# EAGLE board schematic (EAGLE 8.6.0)
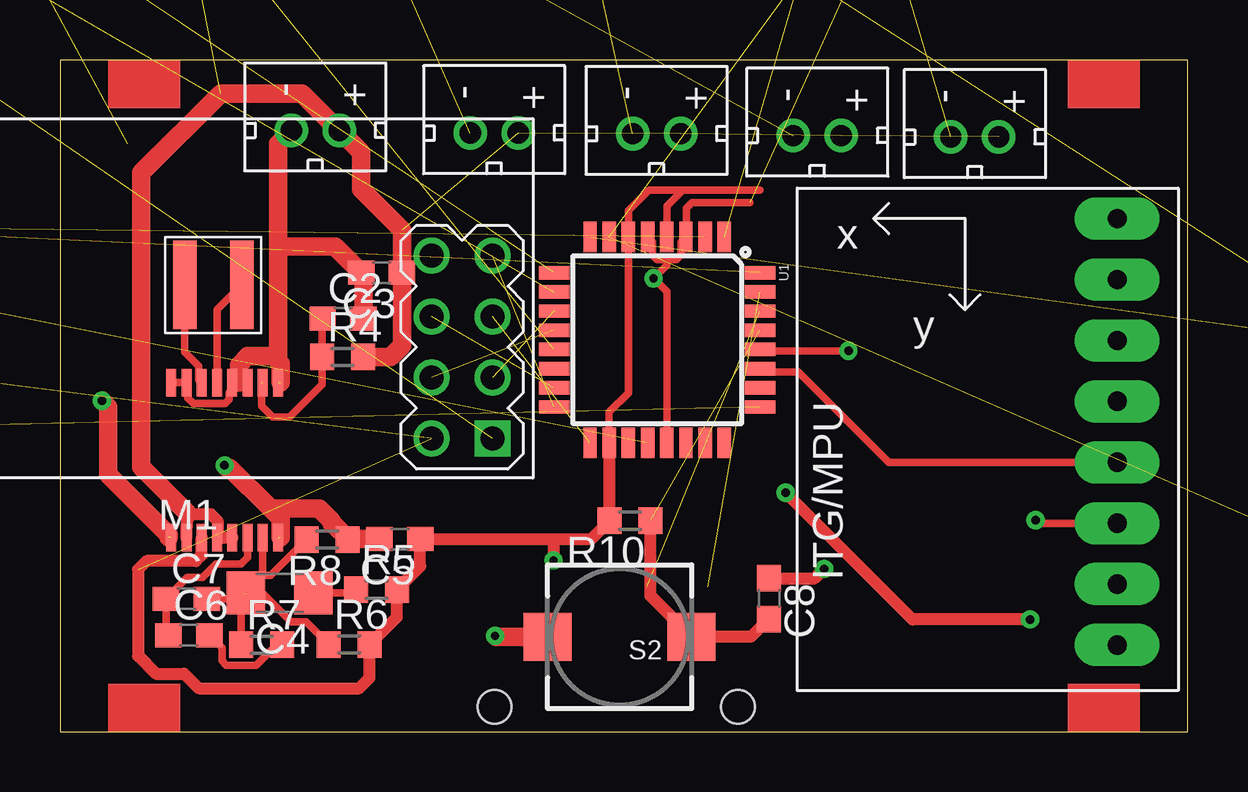
[diagram p0: board, top side]
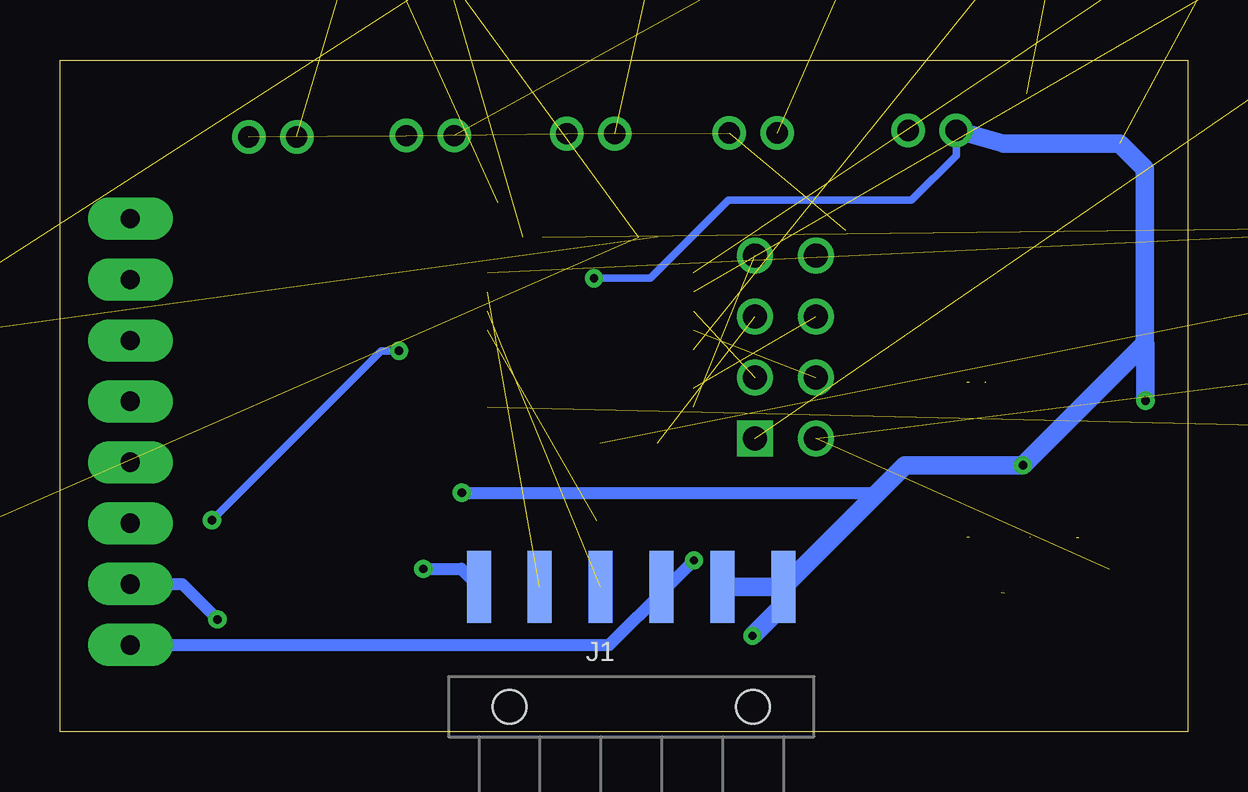
[diagram p1: board, bottom side, seen from below]

Size 47 x 28 mm. Coordinates in mm from the lower left corner, seen from the top.
Outline: 0,0 47,0 47,28 0,28 0,0
Copper layers (1*16): Top 0.035mm / dielectric 1.5mm / Bottom 0.035mm
Design rules "default": minimum track width 6mil, minimum drill 0.35mm, track to track 6mil, track to pad 6mil, pad to pad 6mil, via to via 6mil, smd to smd 6mil, copper to edge 40mil, drill to drill 6mil, minimum pad ring 10mil, minimum via ring 8mil, stop-mask expansion 4mil, vias tented up to drill 0mil, thermal gap 10mil

## Footprints (pad centres in the part's own frame; a part is rotated, then mirrored left to right if it is on the bottom)
C1210 = smd 1.6 x 2.7: 1 -1.4,0; 2 1.4,0
C0603 = smd 1.1 x 1: 1 -0.85,0; 2 0.85,0
C1206 = smd 1.6 x 1.8: 1 -1.4,0; 2 1.4,0
MINI2-F3-B = smd 1.22 x 0.85: NEG 0,1.55; POS 0,-1.5
FTDI_DEVICE_RA_SMT = smd 1 x 3: 1 -6.35,5; 2 -3.81,5; 3 -1.27,5; 4 1.27,5; 5 3.81,5; 6 6.35,5 | hole 1.4: -5.08,0; 5.08,0
XAL4020 = smd 0.98 x 3.7: 1 -1.185,0; 2 1.185,0
SML0603 = smd 0.8 x 0.8: A 0.75,0; C -0.75,0
WIRELESS-NRF24L01 = drill 1 square: 1 -12.7,6.35 | drill 1: 2 -10.16,6.35; 3 -12.7,3.81; 4 -10.16,3.81; 5 -12.7,1.27; 6 -10.16,1.27; 7 -12.7,-1.27; 8 -10.16,-1.27
CSM-7X-DU = smd 5.5 x 2: 1 -4.75,0; 2 4.75,0
R0603 = smd 1 x 1.1: 1 -0.85,0; 2 0.85,0
PUSHBUTTON_SMD_SJ = smd 2 x 2: P$1 3,0; P$2 -3,0
SOT23-3 = smd 0.8 x 0.9: 1 -0.95,-1; 2 0.95,-1; 3 0,1.1
TQFP32-08 = smd 1.27 x 0.559: 1 -4.293,2.8; 2 -4.293,2; 3 -4.293,1.2; 4 -4.293,0.4; 5 -4.293,-0.4; 6 -4.293,-1.2; 7 -4.293,-2; 8 -4.293,-2.8; 17 4.293,-2.8; 18 4.293,-2; 19 4.293,-1.2; 20 4.293,-0.4; 21 4.293,0.4; 22 4.293,1.2; 23 4.293,2; 24 4.293,2.8 | smd 0.559 x 1.27: 9 -2.8,-4.293; 10 -2,-4.293; 11 -1.2,-4.293; 12 -0.4,-4.293; 13 0.4,-4.293; 14 1.2,-4.293; 15 2,-4.293; 16 2.8,-4.293; 25 2.8,4.293; 26 2,4.293; 27 1.2,4.293; 28 0.4,4.293; 29 -0.4,4.293; 30 -1.2,4.293; 31 -2,4.293; 32 -2.8,4.293
GY-521 = drill 0.8 pad 1.778 long: ADO -8.89,-6.35; GND -8.89,6.35; INT -8.89,-8.89; SCL -8.89,3.81; SDA -8.89,1.27; VCC -8.89,8.89; XCL -8.89,-3.81; XDA -8.89,-1.27
SSOP-16GN = smd 0.419 x 1.143: 1 -2.223,-3.226; 2 -1.587,-3.226; 3 -0.953,-3.226; 4 -0.318,-3.226; 5 0.318,-3.226; 6 0.953,-3.226; 7 1.587,-3.226; 8 2.223,-3.226; 9 2.223,3.226; 10 1.587,3.226; 11 0.953,3.226; 12 0.318,3.226; 13 -0.318,3.226; 14 -0.953,3.226; 15 -1.587,3.226; 16 -2.223,3.226
JST_CONNECTOR_FEMALE = drill 0.889: + 0,1; - 0,-1

## Placement (x,y rotation side)
C1  100uF  [C1210]  -182.26,97.2 0 top  (outside the outline)
C2  0.056uF  [C0603]  11.8,17.22 0 top
C3  10uF  [C0603]  13.41,19.13 180 top
C4  65pF  [C1206]  9.16,5.78 180 top
C5  22uF  [C0603]  14.17,8.03 180 top
C6  470pF  [C0603]  5.37,4.02 0 top
C7  10pF  [C0603]  5.27,5.54 0 top
C8  0.1uF  [C0603]  29.55,5.54 270 top
C9  0.1uF  [C0603]  -182.07,63.31 0 top  (outside the outline)
C10  0.1uF  [C0603]  -182.07,58.43 0 top  (outside the outline)
C11  0.1uF  [C0603]  -182.07,53.56 0 top  (outside the outline)
C12  27pF  [C0603]  33.05,33.38 0 top  (outside the outline)
C13  27pF  [C0603]  -31.75,72.39 0 top  (outside the outline)
C14  10uF  [C0603]  -254.72,-18 0 top  (outside the outline)
C15  0.1uF  [C0603]  -254.72,-22.87 0 top  (outside the outline)
D1  DB2W40300L  [MINI2-F3-B]  -67.31,62.23 0 top  (outside the outline)
D2  DB2W40300L  [MINI2-F3-B]  -69.85,62.23 0 top  (outside the outline)
D3  DB2W40300L  [MINI2-F3-B]  10.44,86.79 0 top  (outside the outline)
D4  DB2W40300L  [MINI2-F3-B]  -2.16,70.38 0 top  (outside the outline)
J1  FTDI_DEVICERA_SMT  [FTDI_DEVICE_RA_SMT]  23.19,1.04 0 bottom
L1  3.3uH  [XAL4020]  6.39,18.62 180 top
LED1  RED  [SML0603]  -255.32,-47.86 0 top  (outside the outline)
LED2  RED  [SML0603]  -255.32,-51.7 0 top  (outside the outline)
LED3  YELLOW  [SML0603]  -255.32,-55.55 0 top  (outside the outline)
LED4  YELLOW  [SML0603]  -255.32,-59.39 0 top  (outside the outline)
M1  WIRELESS-NRF24L01  [WIRELESS-NRF24L01]  5.33,18.57 180 top
Q1  8MHz  [CSM-7X-DU]  54.88,11.36 90 top  (outside the outline)
R1  820  [R0603]  -133.35,35.33 0 top  (outside the outline)
R2  10K  [R0603]  -255.9,11.78 0 top  (outside the outline)
R3  10K  [R0603]  -255.9,6.91 0 top  (outside the outline)
R4  200K  [R0603]  11.78,15.62 0 top
R5  10K  [R0603]  13.2,5.92 0 top
R6  374K  [R0603]  12.05,3.63 0 top
R7  15K  [R0603]  8.41,3.62 0 top
R8  162K  [R0603]  11.14,8 180 top
R9  820  [R0603]  -133.35,31.03 0 top  (outside the outline)
R10  10K  [R0603]  23.76,8.79 180 top
R11  820  [R0603]  -133.35,22.44 0 top  (outside the outline)
R12  820  [R0603]  -133.35,26.74 0 top  (outside the outline)
R13  10K  [R0603]  -175.35,117.32 0 top  (outside the outline)
R14  10K  [R0603]  -175.35,112.44 0 top  (outside the outline)
R15  10K  [R0603]  -255.9,-27.75 0 top  (outside the outline)
R16  10K  [R0603]  -255.9,-32.63 0 top  (outside the outline)
S2  PUSH_BUTTON  [PUSHBUTTON_SMD_SJ]  23.33,3.95 180 top
T1  NMOS  [SOT23-3]  33.15,37.08 0 top  (outside the outline)
T2  NMOS  [SOT23-3]  -50.8,68.58 0 top  (outside the outline)
T3  NMOS  [SOT23-3]  -63.5,68.58 0 top  (outside the outline)
T4  NMOS  [SOT23-3]  -24.13,73.66 0 top  (outside the outline)
U1  ATMEGA328P_TQFP  [TQFP32-08]  24.89,16.33 270 top
U2  GY-521MPU6050  [GY-521]  35.18,12.5 180 top
U3  LTC3534  [SSOP-16GN]  6.86,11.32 180 top
U$1  JST_CONNECTOR_FEMALE  [JST_CONNECTOR_FEMALE]  10.64,25.07 270 top
U$4  JST_CONNECTOR_FEMALE  [JST_CONNECTOR_FEMALE]  38.13,24.79 270 top
U$7  JST_CONNECTOR_FEMALE  [JST_CONNECTOR_FEMALE]  31.57,24.85 270 top
U$10  JST_CONNECTOR_FEMALE  [JST_CONNECTOR_FEMALE]  24.87,24.93 270 top
U$13  JST_CONNECTOR_FEMALE  [JST_CONNECTOR_FEMALE]  18.1,24.96 270 top

## Library data of the parts
C1 C4 C8-C11 = rcl; SPICEPREFIX: C
C2 C3 C5-C7 C12-C15 R2-R8 R10 R13-R16 = resistor
D1-D4 M1 U2 U$1 U$4 U$7 U$10 U$13 = quad
J1 = quad; PROD_ID: CONN-08971
L1 = coilcraft
LED1-LED4 = led
Q1 = crystal; OC_FARNELL: unknown; OC_NEWARK: unknown
R1 R9 R11 R12 = rcl; SPICEPREFIX: R
S2 = adafruit
T1-T4 = quad; DATASHEET: http://www.mouser.com/ds/2/196/irlml6244pbf-936666.pdf; MOUSER: 942-IRLML6244TRPBF; URL: http://www.mouser.com/Search/ProductDetail.aspx?R=IRLML6244TRPBFvirtualkey57370000virtualkey942-IRLML6244TRPBF
U1 = quad; PROD_ID: IC-09069
U3 = LTC3534

## Nets
CE: M1.3 U1.11
CSN: M1.4 U1.12
DEBUG_LED1: R12.2 U1.32
DEBUG_LED2: R11.2 U1.2
DTR: C8.1 J1.1
GND: C1.2 C2.2 C3.2 C5.2 C9.2 C10.2 C11.2 C12.2 C13.2 C14.2 C15.2 J1.5 J1.6 LED1.C LED2.C LED3.C LED4.C M1.1 R3.1 R8.1 R13.1 R14.1 R15.1 R16.1 S2.P$1 T1.2 T2.2 T3.2 T4.2 U1.3 U1.5 U1.21 U2.GND U3.1 U3.3 U3.4 U3.7 U3.8 U3.9 U3.16 U$1.-
MISO: M1.7 U1.16
MOSI: M1.6 U1.15
N$1: C12.1 Q1.1 U1.7
N$2: C8.2 R10.1 S2.P$2 U1.29
N$3: D1.POS T1.3 U$4.-
N$4: C13.1 Q1.2 U1.8
N$5: D2.POS T2.3 U$7.-
N$6: D3.POS T3.3 U$10.-
N$7: D4.POS T4.3 U$13.-
N$8: L1.1 U3.5
N$9: L1.2 U3.6
N$10: LED1.A R1.2
N$11: LED2.A R9.1
N$12: LED3.A R12.1
N$13: LED4.A R11.1
N$14: C4.1 R5.1
N$16: C2.1 R4.1 U3.2
N$18: C4.2 C7.2 R6.1 R7.1 R8.2 U3.15
N$19: C6.1 C7.1 U3.14
N$20: C6.2 R7.2
N$25: C11.1 U1.20
PWM1: R13.2 T1.1 U1.1
PWM2: R14.2 T2.1 U1.9
PWM3: R15.2 T3.1 U1.10
PWM4: R16.2 T4.1 U1.13
PWR: C1.1 C3.1 D1.NEG D2.NEG D3.NEG D4.NEG R1.1 R2.2 R4.2 U3.10 U3.12 U3.13 U$1.+ U$4.+ U$7.+ U$10.+ U$13.+
RXD: J1.3 U1.30
SCK: M1.5 U1.17
SCL: U1.28 U2.SCL
SDA: U1.27 U2.SDA
TXD: J1.2 U1.31
V_BAT: R2.1 R3.2 U1.25
V_REG_OUT: C5.1 C9.1 C10.1 C14.1 C15.1 J1.4 M1.2 R5.2 R6.2 R9.2 R10.2 U1.4 U1.6 U1.18 U2.VCC U3.11

## Tracks (layer width: path | path; a pad name or v marks a point on that pad's centre or on a via)
CE  (1 unrouted)
CSN  (1 unrouted)
DEBUG_LED1  (1 unrouted)
DEBUG_LED2  (1 unrouted)
DTR  (via drill 0.35)
  Top 0.508: C8.1 31.46,6.39 v31.85,6.78
  Bottom 0.508: v31.85,6.78 30.28,6.78 J1.1
GND  (via drill 0.35)  (25 unrouted)
  Top 0.305: U3.4 7.47,14.54 | 7.47,14.54 U3.3 | 7.47,14.54 7.06,14.13 7.06,13.85 6.88,13.67 5.57,13.67 5.33,13.91 5.33,14.49 U3.7 U3.8 | 25.3,19.68 24.89,19.68 24.71,19.86 24.71,20.41 U1.5 | 25.3,19.68 25.7,19.68 25.88,19.86 25.88,20.41 U1.3 26.11,20.64 26.11,21.82 26.34,22.05 28.75,22.05 | 25.3,19.68 25.3,19.46 v24.74,18.9 25.29,18.34 U1.21
  Top 0.508: v40.44,4.67 35.53,4.67 v30.25,9.96
  Top 0.762: C2.2 12.65,19.03 C3.2 11.46,20.22 9.09,20.22 | 7.47,14.54 7.47,15.29 7.83,15.65 8.89,15.65 9.09,15.45 | 9.09,15.45 9.09,20.22 | 9.09,15.45 9.09,15.44 9.19,15.34 9.19,14.54 | 4.53,8.09 4.53,8.2 2.01,10.72 2.01,13.54 v1.75,13.79 | v6.86,11.1 6.96,11 7.08,11 8.79,9.29 | 9.09,20.22 9.09,24.51 U$1.- | C5.2 12.01,8.03 | 12.01,8.03 R8.1 | 8.79,9.29 9.19,8.88 9.19,8.09 | 11.32,8.67 11.32,8.72 | 8.79,9.29 10.8,9.29 11.32,8.77 11.32,8.72 | 11.32,8.72 12.01,8.03 | S2.P$1 18.17,3.95 v18.14,3.99
  Bottom 0.305: v24.74,18.9 22.38,18.9 19.13,22.15 11.51,22.15 9.64,24.01 U$1.-
  Bottom 0.508: U2.GND 41.91,6.15 v40.44,4.67 | v30.25,9.96 12.93,9.96 11.78,11.1
  Bottom 0.762: 1.78,16.18 v6.86,11.1 11.78,11.1 J1.6 | 1.78,16.18 1.78,23.47 2.82,24.51 7.66,24.51 U$1.- | v1.75,13.79 1.75,16.15 1.78,16.18 | v18.14,3.99 16.84,5.28 J1.6 | J1.5 J1.6
MISO  (1 unrouted)
MOSI  (1 unrouted)
N$1  (2 unrouted)
N$2  (1 unrouted)
  Top 0.508: C8.2 28.81,3.95 S2.P$2 24.61,5.67 R10.1
N$3  (2 unrouted)
N$4  (2 unrouted)
N$5  (2 unrouted)
N$6  (2 unrouted)
N$7  (2 unrouted)
N$8
  Top 0.305: U3.5 6.54,17.59 L1.1
N$9
  Top 0.305: U3.6 5.79,14.66 5.79,15.24 5.2,15.83 L1.2
N$10  (1 unrouted)
N$11  (1 unrouted)
N$12  (1 unrouted)
N$13  (1 unrouted)
N$14
  Top 0.305: C4.1 12.21,5.78 R5.1
N$16  (1 unrouted)
  Top 0.305: C2.1 10.93,17.2 R4.1 10.93,14.46 9.58,13.11 8.87,13.11 8.4,13.57 8.4,14.54
N$18  (1 unrouted)
  Top 0.305: 7.22,5.72 C4.2 | C4.2 8.45,6.47 8.45,6.5 | 7.38,3.81 R7.1 7.56,5.4 7.42,5.54 | C7.2 7.42,5.54 | 7.42,5.54 7.64,5.76 | U3.15 8.45,6.5 | R6.1 10.26,4.57 9.63,4.57 8.43,5.78 C4.2 | R8.2 8.79,6.5 8.45,6.5
N$19
  Top 0.305: C6.1 4.42,4.12 C7.1 5.31,6.43 5.94,6.43 6.5,6.98 7.54,6.98 7.82,7.25 U3.14
N$20
  Top 0.305: R7.2 9.04,3.62 8.19,2.76 6.93,2.76 6.75,2.94 6.75,3.48 C6.2
N$25  (1 unrouted)
PWM1  (2 unrouted)
PWM2  (2 unrouted)
PWM3  (2 unrouted)
PWM4  (2 unrouted)
PWR  (12 unrouted)
  Top 0.508: U3.13 6.57,8.09 6.57,8.79 6.29,9.07 5.34,9.07 5.28,9.01 5.28,8.57 | 5.28,8.57 5.29,8.55 | U3.10 5.28,8.57
  Top 0.762: R4.2 13.79,15.62 14.26,16.09 C3.1 14.26,20.9 12.55,22.6 12.55,24.16 U$1.+ 11.62,25.07 10.08,26.6 6.69,26.6 3.38,23.29 3.38,11.03 5.34,9.07
RXD  (1 unrouted)
SCK  (1 unrouted)
SCL  (via drill 0.35)
  Top 0.305: U2.SCL 40.79,8.69 v40.66,8.81 | v32.87,15.88 29.24,15.88 U1.28
  Bottom 0.305: v40.66,8.81 33.6,15.88 v32.87,15.88
SDA
  Top 0.305: U1.27 29.33,14.99 30.79,14.99 34.54,11.23 U2.SDA
TXD  (1 unrouted)
V_BAT  (2 unrouted)
V_REG_OUT  (via drill 0.35)  (6 unrouted)
  Top 0.305: 25.96,22.58 29.18,22.58 | U1.4 25.29,21.91 25.96,22.58 | 25.96,22.58 24.56,22.58 23.69,21.71 U1.6 23.69,14.12 22.89,13.32 U1.18
  Top 0.508: U3.11 5.91,7.36 5.67,7.11 3.61,7.11 3.25,6.76 3.25,3.15 3.99,2.41 5.17,2.41 5.77,1.8 12.47,1.8 12.9,2.23 R6.2 14.05,4.77 R5.2 15.02,6.89 C5.1 20.68,8.03 | 20.68,8.03 22.15,8.03 R10.2 22.91,12.02 U1.18 | 20.68,8.03 20.57,7.93 v20.57,7.14
  Bottom 0.508: v20.57,7.14 21.67,6.04 | 21.67,6.04 J1.4 | U2.VCC 24.11,3.61 21.67,6.04
(copper drawn outside any net)
  shapes: Top area x13